# Altium PCB magArraySensor.PcbDoc
Units mil, origin at the board's own origin, x right, y up, seen from the top; angles counter-clockwise.
Board outline 9000 x 800 mil, 2 copper layers (Top Layer, Bottom Layer); 36 components, 11 nets, 60 pads, 0 vias.
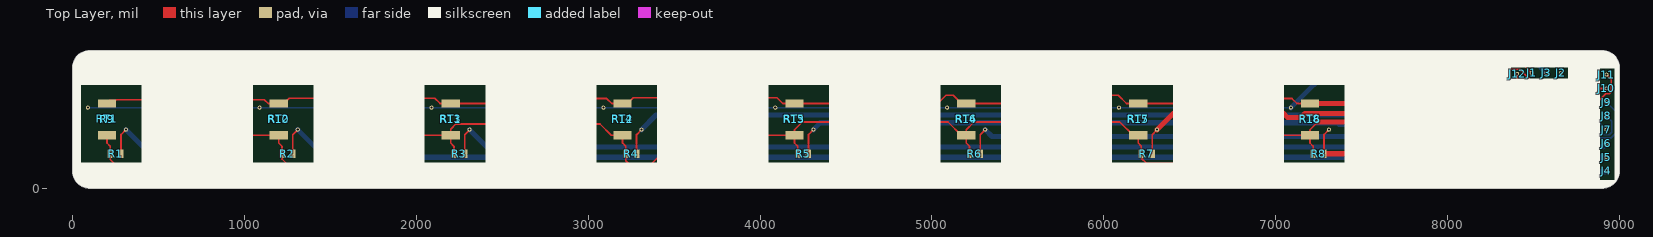
[diagram p0: Top Layer view]
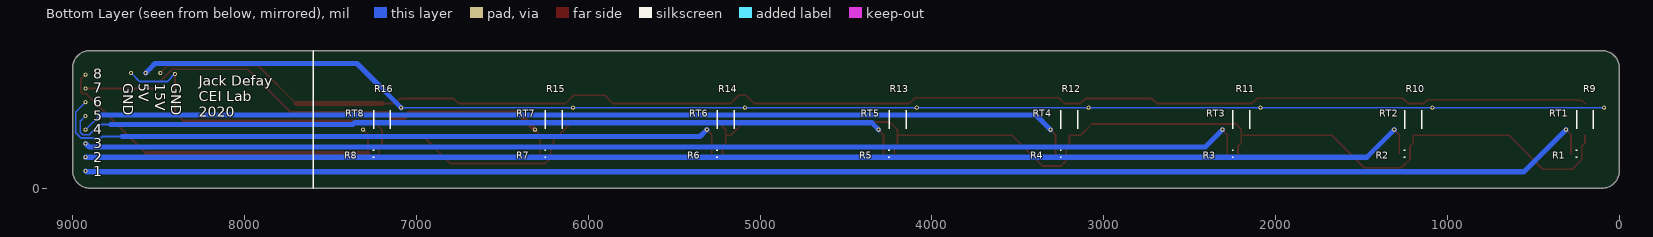
[diagram p1: Bottom Layer view, seen from below]

## Layer stack, top to bottom
Top Solder: solder mask 0.4, Solder Resist, Dk 3.5
Top Layer: signal copper 1.4
Dielectric 1: dielectric 12.6, FR-4, Dk 4.8
Bottom Layer: signal copper 1.4
Bottom Solder: solder mask 0.4, Solder Resist, Dk 3.5

## Board outline
0,100 ccw(c100,100) 100,0 8900,0 ccw(c8900,100) 9000,100 9000,700 ccw(c8900,700) 8900,800 100,800 ccw(c100,700) 0,700

## Design rules (kind name [scope] priority, off if disabled: settings)
Clearance [All] p1: gap=10 ignorepadtopadclearanceinfootprint=FALSE except(0: Arc-Hole Track-Hole SMDPad-Hole THPad-Hole Via-Hole Fill-Hole Poly-Hole Region-Hole Text-Hole)
PolygonConnect [All] p1: connectstyle=Relief reliefconductorwidth=10 reliefentries=4 polygonreliefangle="90 Angle" airgapwidth=10
RoutingVias [All] p1: holewidth=28 width=50 viastyle="Through Hole" minholewidth=28 minwidth=50 maxholewidth=28 maxwidth=50
SolderMaskExpansion [All] p1: expansion=4 istentingtop=FALSE
Width [All] p1 off: maxlimit=10 minlimit=10 preferedwidth=10
30 further rules are at their usual default settings.

## Classes and differential pairs
component class [04]-Connector: J1 J2 J3 J4 J5 J6 J7 J8 J9 J10 J11 J12
component class "[03]-Heating Element": R9 R10 R11 R12 R13 R14 R15 R16
component class [02]-Thermistors: R1 R2 R3 R4 R5 R6 R7 R8 RT1 RT2 RT3 RT4 RT5 RT6 RT7 RT8

## Components (designator, comment, footprint, x,y, rotation, side; value= is the part's Value field where it differs from the comment)
J1 "15V" PIN 8490,670 r180 top
J2 "GND" PIN 8660,670 r180 top
J3 "5V" PIN 8575,670 r180 top
J4 "sensor_read" PIN 8925,100 r180 top
J5 "sensor_read" PIN 8925,180 r180 top
J6 "sensor_read" PIN 8925,260 r180 top
J7 "sensor_read" PIN 8925,340 r180 top
J8 "sensor_read" PIN 8925,420 r180 top
J9 "sensor_read" PIN 8925,500 r180 top
J10 "sensor_read" PIN 8925,580 r270 top
J11 "sensor_read" PIN 8925,660 r180 top
J12 "GND" PIN 8405,665 r90 top
R1 "10kOhm" RESC2013X60X35LL10T20 250,200 r0 top
R2 "10kOhm" RESC2013X60X35LL10T20 1250,200 r0 top
R3 "10kOhm" RESC2013X60X35LL10T20 2250,200 r0 top
R4 "10kOhm" RESC2013X60X35LL10T20 3250,200 r0 top
R5 "10kOhm" RESC2013X60X35LL10T20 4250,200 r0 top
R6 "10kOhm" RESC2013X60X35LL10T20 5250,200 r0 top
R7 "10kOhm" RESC2013X60X35LL10T20 6250,200 r0 top
R8 "10kOhm" RESC2013X60X35LL10T20 7250,200 r0 top
R9 "100 Ohm" RESC2010(5025)_N 200,400 r90 top
R10 "100 Ohm" RESC2010(5025)_N 1200,400 r90 top
R11 "100 Ohm" RESC2010(5025)_N 2200,400 r90 top
R12 "100 Ohm" RESC2010(5025)_N 3200,400 r90 top
R13 "100 Ohm" RESC2010(5025)_N 4200,400 r90 top
R14 "100 Ohm" RESC2010(5025)_N 5200,400 r90 top
R15 "100 Ohm" RESC2010(5025)_N 6200,400 r90 top
R16 "100 Ohm" RESC2010(5025)_N 7200,400 r90 top
RT1 "" THERMISTOR 310,340 r150 top
RT2 "" THERMISTOR 1310,340 r150 top
RT3 "" THERMISTOR 2310,340 r150 top
RT4 "" THERMISTOR 3310,340 r150 top
RT5 "" THERMISTOR 4310,340 r150 top
RT6 "" THERMISTOR 5310,340 r150 top
RT7 "" THERMISTOR 6310,340 r150 top
RT8 "" THERMISTOR 7310,340 r150 top

## Footprints (in the part's own frame and the unit in brackets; to place one, negate y for a bottom-side part, rotate by r counter-clockwise, add the part's x,y. Pads: shape width x height; smd on the part's side, far side on the other; paste and mask are expansions set on the pad)
PIN [mil]
  round 24 hole 12: 1(0,0)
RESC2010(5025)_N [mm] "Chip Resistor, Body 5.0x2.5mm, IPC Medium Density"
  rect 1.25x2.7 smd: 1(-2.35,0) 2(2.35,0)
  body extent -2.6,-1.35 2.6,1.35, height 0.71
RESC2013X60X35LL10T20 [mm]
  rect 0.8x1.25 smd: 1(-0.8,0) 2(0.8,0)
  body extent -1.05,-0.67 1.05,0.67, height 0.6
THERMISTOR [mil]
  round 24 hole 12: 0(0,0) 1(255.9,0)

## Part data
J3: library part 15V
R1 R2 R3 R4 R5 R6 R7 R8: library part CMP-1659-00013-2, "RES 10.0K OHM 1/8W 1% 0805 SMD", Manufacturer=Yageo, MPN=RC0805FR-0710KL, ComponentLink1Description=Datasheet, ComponentLink1URL=http://www.yageo.com/documents/recent/PYu-RC_Group_51_RoHS_L_04.pdf, PackageReference=0805
R9 R10 R11 R12 R13 R14 R15 R16: library part CMP-1017-00308-1, "100 Ohms ±1% 2W Chip Resistor 2010 (5025 Metric) Thick Film", Case-EIA=2010, Manufacturer="TE Connectivity Passive Product", MPN=3502100RFT
RT1 RT2 RT3 RT4 RT5 RT6 RT7 RT8: library part thermistor

## Nets (pads, with @x,y where several pads share a name; then routed paths per layer and width w, separated by ;. In a path a pad name is that pad's centre, name@x,y a point inside that pad or via, vN(x,y) a via of type N, cw(c..) or ccw(c..) an arc to the next point about the centre after c; other vN are vias at no path point)
5V: J3.1 RT1.1 RT2.1 RT3.1 RT4.1 RT5.1 RT6.1 RT7.1 RT8.1 | length 8615.9
  Bottom Layer w10: RT1.1 RT2.1 RT3.1 RT4.1 RT5.1 RT6.1 RT7.1 RT8.1
  Bottom Layer w30: RT8.1 7345.43,725 8520,725 8548,697 J3.1
15V: J1.1 R9.2 R10.2 R11.2 R12.2 R13.2 R14.2 R15.2 R16.2 | length 8595.8
  Top Layer w10: R9.2 219.61,512.13 251.13,512.13 254.01,515 1115.52,515 1138,492.52 R10.2 1229,492.52 1259.48,523 2107.52,523 2138,492.52 R11.2 2691.52,492.52 2720,521 3108.52,521 3137,492.52 R12.2 3229,492.52 3262.48,526 4098.52,526 4132,492.52 R13.2 5034.04,492.52 5081.52,540 5123.52,540 5171,492.52 R14.2 5856.52,492.52 5904,540 6085,540 6132.48,492.52 6753.52,492.52 6782,521 7095.52,521 7124,492.52 R16.2 ; 7700,492.52 7919.48,712 8448,712 J1.1
  Top Layer w30: R16.2 7700,492.52
GND: J2.1 J12.1 R1.1 R2.1 R3.1 R4.1 R5.1 R6.1 R7.1 R8.1 R9.1 R10.1 R11.1 R12.1 R13.1 R14.1 R15.1 R16.1 | length 10399.8
  Top Layer w10: R9.1 200,262.5 218.5,244 R1.1 218.75,199.76 218.75,166.25 275,110 445,110 642.48,307.48 R10.1 1200,262.5 1218.5,244 R2.1 1218.5,169.5 1270,118 1484,118 1673.48,307.48 R11.1 ; R3.1 2218.5,244 2200,262.5 R11.1 ; R5.1 4218.5,244 4200,262.5 R13.1 ; R6.1 5218.5,244 5200,262.5 R14.1 ; R8.1 7218.5,244 7200,262.5 R16.1 ; 7245,385 7200,340 R16.1 ; 8342.71,377.71 8405,440 J12.1 ; R11.1 2200,343 2230,373 3068.48,373 3134,307.48 R12.1 3200,262.5 3218.5,244 R4.1 3218.5,160 3249.5,129 3356,129 3534.48,307.48 R13.1 ; R13.1 4200,340 4245,385 5093.48,385 5171,307.48 R14.1 ; R14.1 5200,340 5245,385 6093.48,385 6171,307.48 R15.1 6200,262.5 6218.5,244 R7.1 6218.5,174.5 6250,143 6802,143 6966.48,307.48 R16.1
  Top Layer w30: 7245,385 8350,385
  Bottom Layer w10: J12.1 8450,620 8610,620 J2.1
read1: J4.1 R1.2 RT1.0 | length 8870.4
  Top Layer w10: R1.2 281.5,311.5 RT1.0
  Bottom Layer w30: RT1.0 555,95 8920,95 J4.1
read2: J5.1 R2.2 RT2.0 | length 7833.1
  Top Layer w10: R2.2 1281.5,311.5 RT2.0
  Bottom Layer w30: RT2.0 1470,180 J5.1
read3: J6.1 R3.2 RT3.0 | length 6816.5
  Top Layer w10: R3.2 2281.5,311.5 RT3.0
  Bottom Layer w30: RT3.0 2410,240 8905,240 J6.1
read4: J7.1 R4.2 RT4.0 | length 5837.2
  Top Layer w10: R4.2 3281.5,311.5 RT4.0
  Bottom Layer w10: 8840,425 J7.1
  Bottom Layer w30: RT4.0 3395,425 8840,425
read5: J8.1 R5.2 RT5.0 | length 4954.6
  Top Layer w10: R5.2 4281.5,311.5 RT5.0
  Bottom Layer w10: 8779.46,370 8845,370 8903.75,311.25 8940.59,311.25 8955,325.66 8955,390 J8.1
  Bottom Layer w30: RT5.0 4350,380 7360,380 7370,370 8779.46,370
read6: J9.1 R6.2 RT6.0 | length 4057.9
  Top Layer w10: R6.2 5281.5,311.5 RT6.0
  Bottom Layer w10: 8712.96,300 8827.57,300 8836.32,291.25 8950.93,291.25 8981.69,322.01 8981.69,443.31 J9.1
  Bottom Layer w30: RT6.0 5350,300 8712.96,300
read7: J10.1 R7.2 RT7.0 | length 2982.2
  Top Layer w10: R7.2 6281.5,311.5 RT7.0 ; 7721.25,435 7725,435 7982,692 8420,692 8532,580 J10.1
  Top Layer w30: RT7.0 6408,438 7042,438 7070,410 7145,410 7170,435 7721.25,435
read8: J11.1 R8.2 RT8.0 | length 2082.6
  Top Layer w10: R8.2 7281.5,311.5 RT8.0 ; 8571,200 8920,549 8941,549 8952,560 8952,633 J11.1
  Top Layer w30: R8.2 8571,200

## Polygon pours and split planes (outlines as drawn)
no net on Top Overlay "NONET_L01_P-001" (solid): 0,100 ccw(c100,100) 100,0 8900,0 ccw(c8900,100) 9000,100 9000,700 ccw(c8900,700) 8900,800 100,800 ccw(c100,700) 0,700

## Silkscreen, mask and mechanical layers (free items; w line width, h text height)
Top Overlay:
  pour cut-out: 4050,150 4050,600 4400,600 4400,150
  pour cut-out: 8370,700 8700,700 8700,640 8370,640
  pour cut-out: 8890,50 8890,695 8970,695 8970,50
  pour cut-out: 5050,150 5050,600 5400,600 5400,150
  pour cut-out: 3050,150 3050,600 3400,600 3400,150
  pour cut-out: 2050,150 2050,600 2400,600 2400,150
  pour cut-out: 1050,150 1050,600 1400,600 1400,150
  pour cut-out: 50,150 50,600 400,600 400,150
  pour cut-out: 6050,150 6050,600 6400,600 6400,150
  pour cut-out: 7050,150 7050,600 7400,600 7400,150
Bottom Overlay:
  lines w10: 7600,0 7600,800
  text "8" at 8880,635 h60
  text "GND" at 8425,610 h60 r90
  text "15V" at 8520,610 h60 r90
  text "5V" at 8615,610 h60 r90
  text "GND" at 8705,610 h60 r90
  text "7" at 8880,554.29 h60
  text "6" at 8880,473.57 h60
  text "Jack Defay / CEI Lab / 2020" at 8264.91,415 h60
  text "5" at 8880,392.86 h60
  text "4" at 8880,312.14 h60
  text "3" at 8880,231.43 h60
  text "2" at 8880,150.71 h60
  text "1" at 8880,70 h60
board_outline:
  the board outline again, w10